# Altium PCB ECG_Signals_V1.0_ZM_20211208.PcbDoc (part 1 of 2)
Units mil, origin at the board's own origin, x right, y up, seen from the top; angles counter-clockwise.
Board outline 3748.77 x 3514.74 mil, 2 copper layers (Top Layer, Bottom Layer); 332 components, 192 nets, 922 pads, 810 vias.
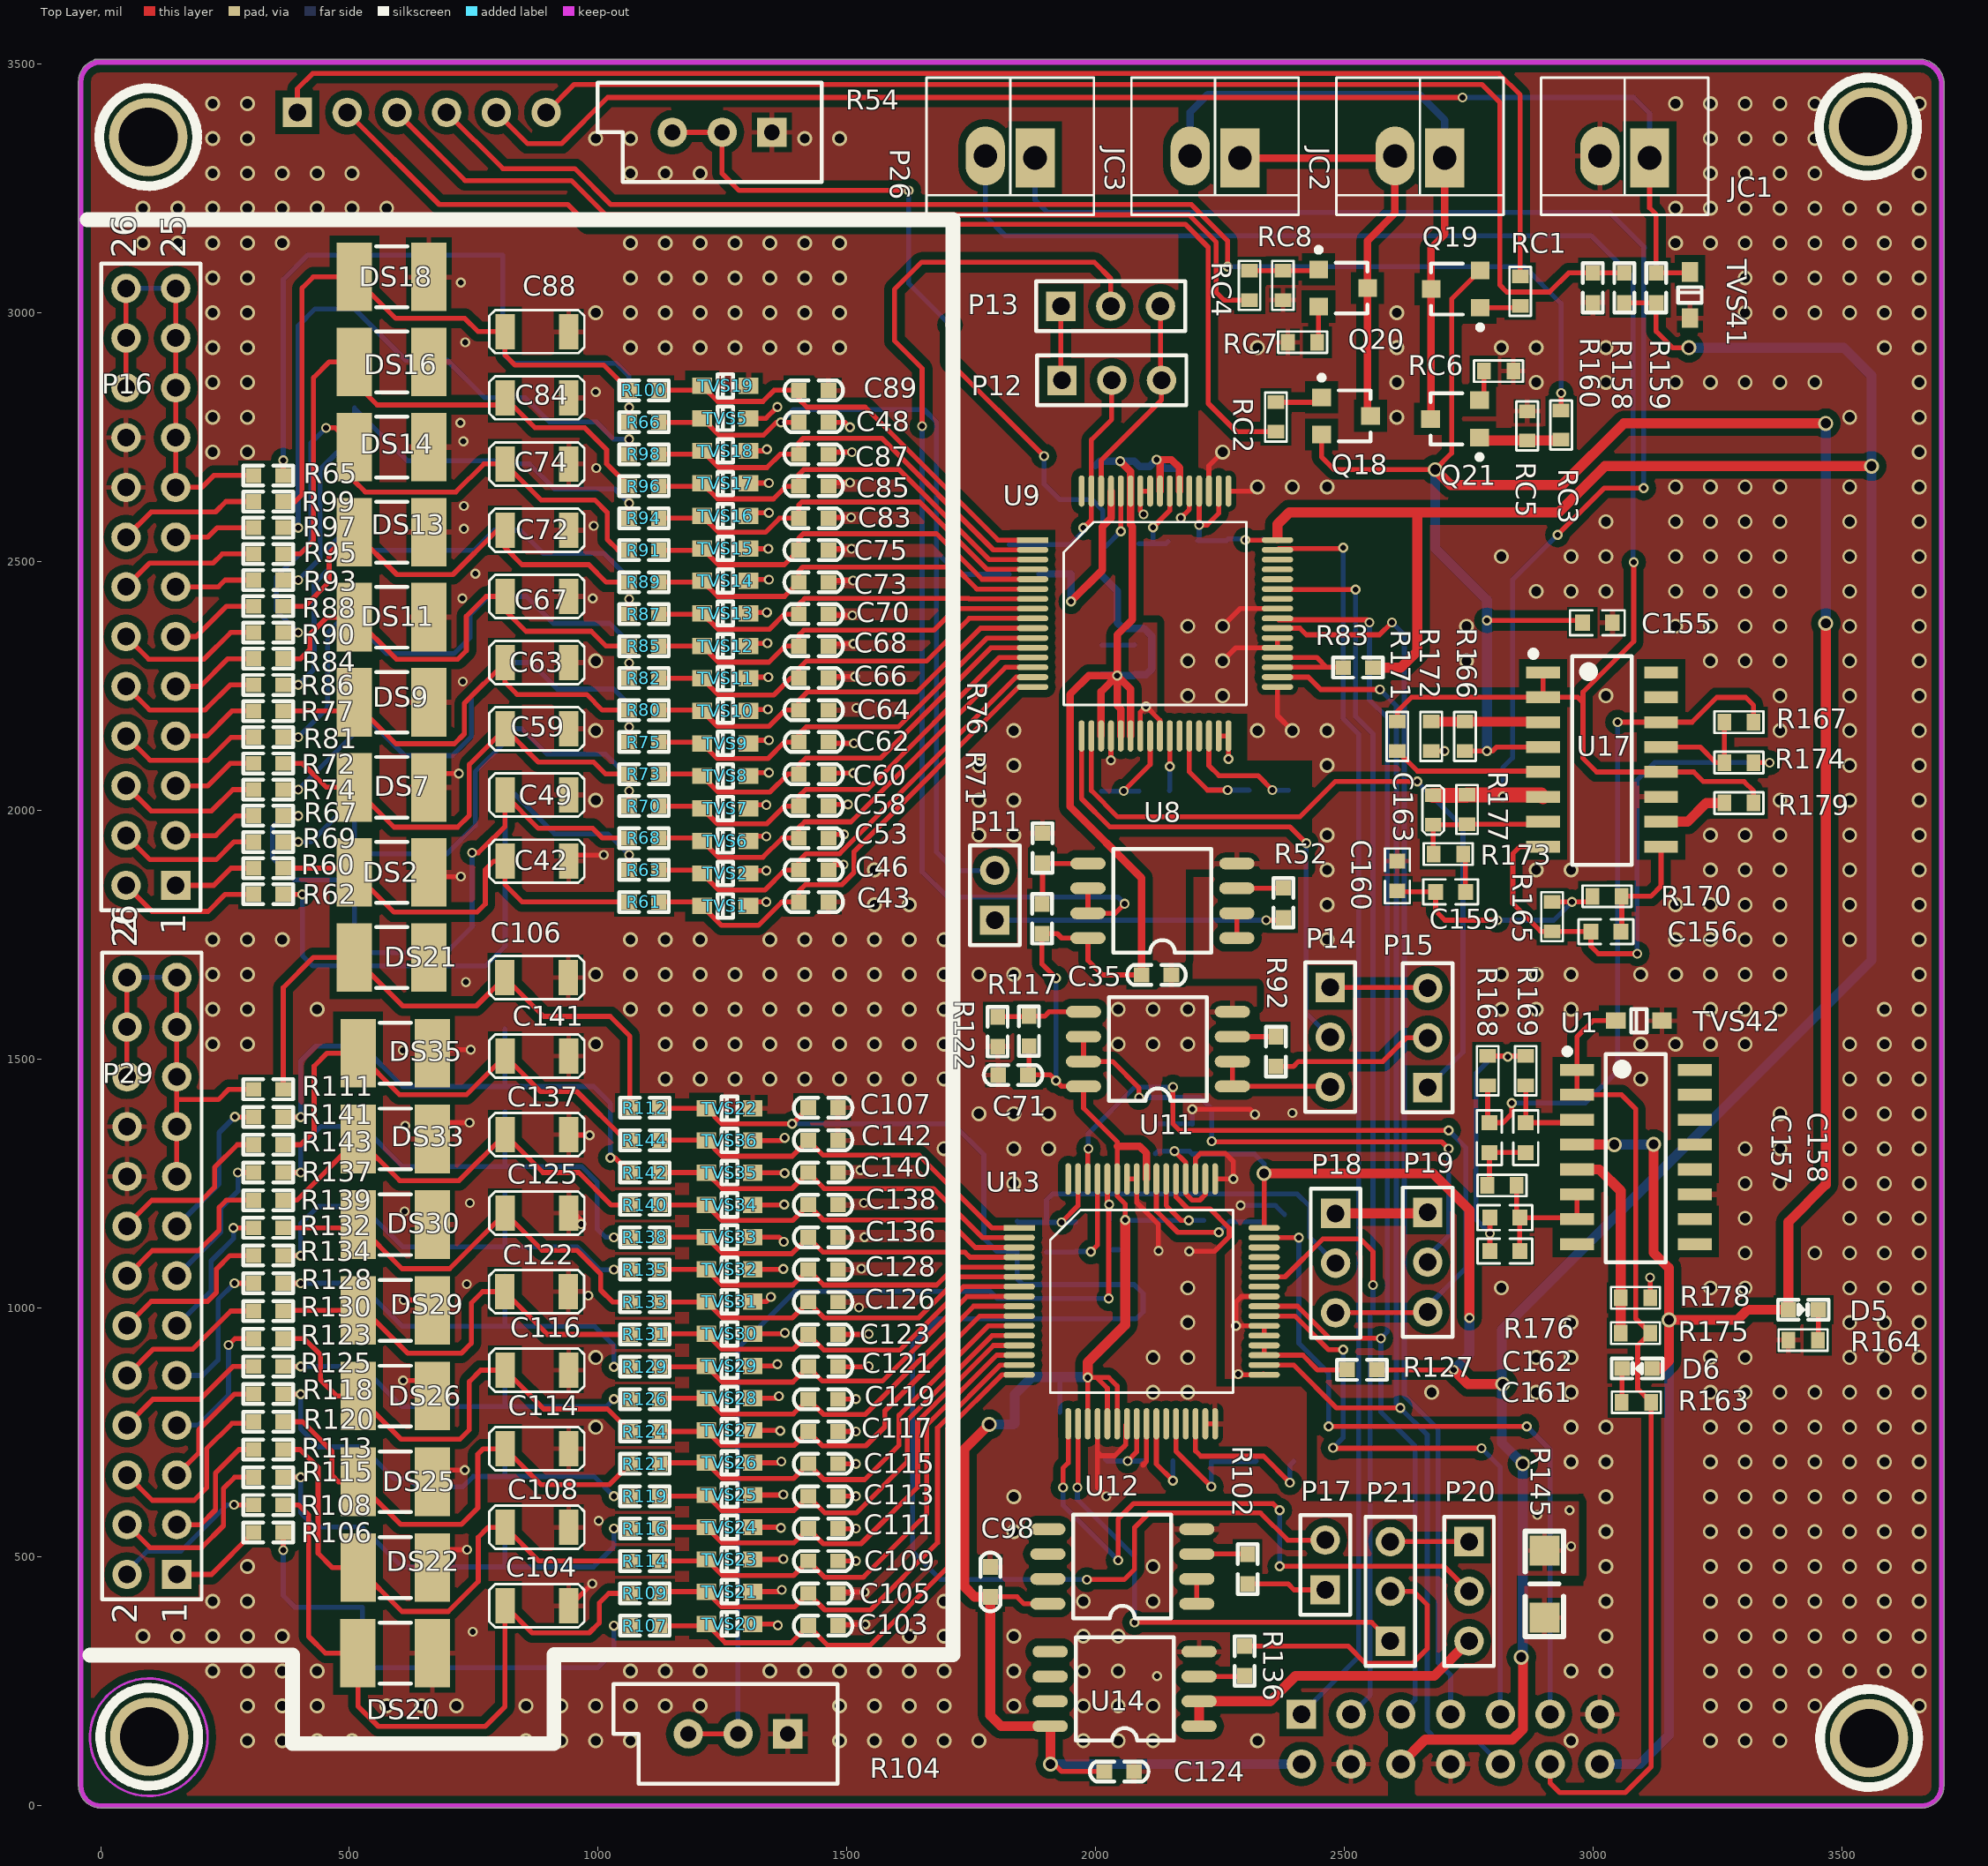
[diagram p0: Top Layer view]
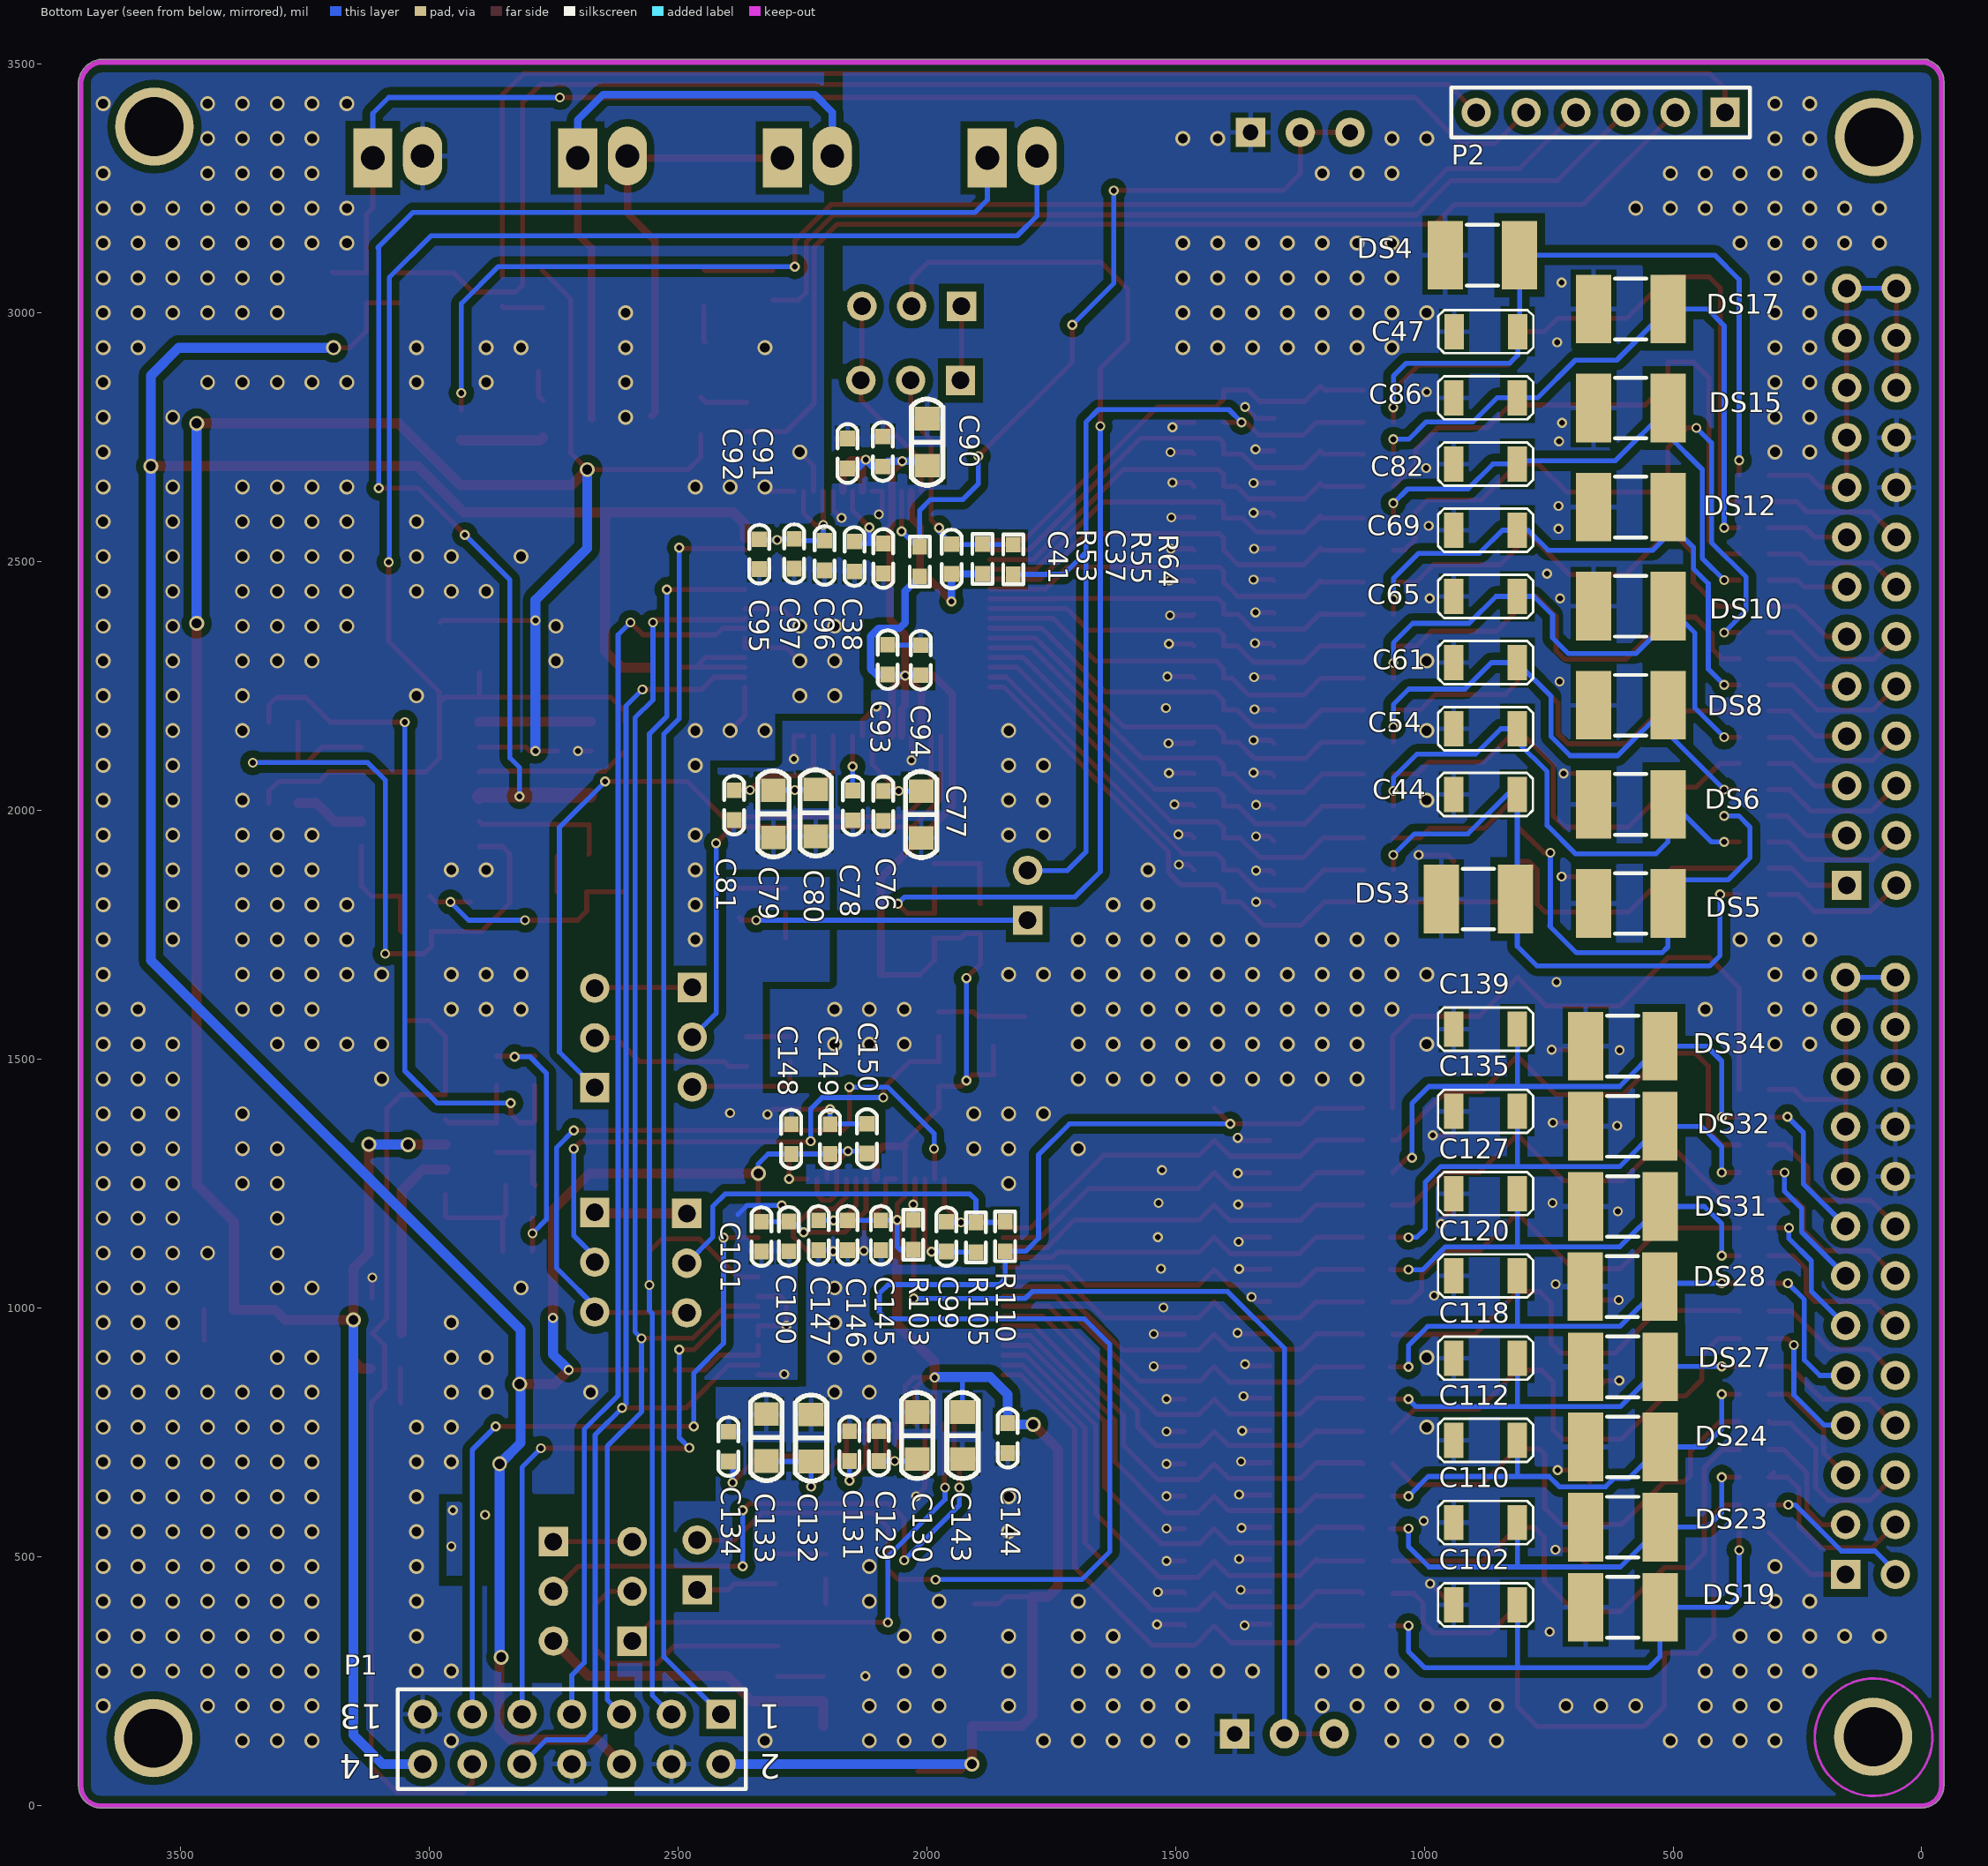
[diagram p1: Bottom Layer view, seen from below]
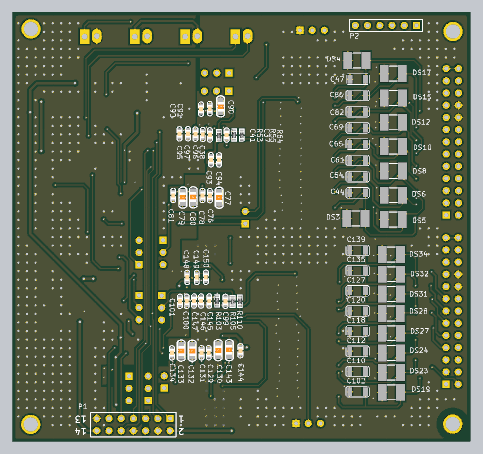
[diagram p3: 3D render of the assembled board from below, using the file's embedded part models]

## Layer stack, top to bottom
Top Solder: solder mask 0.4, Solder Resist, Dk 3.5
Top Layer: signal copper 1.4
Dielectric1: dielectric 12.6, FR-4, Dk 4.8
Bottom Layer: signal copper 1.4
Bottom Solder: solder mask 0.4, Solder Resist, Dk 3.5

## Board outline
-44.39,39.37 -44.39,3464.57 cw(c-39.37,3464.57) -44.38,3464.78 cw(c-39.37,3465) -44.39,3465 cw(c0,3465) -14.25,3507.04 cw(c-10,3504.37) -10,3509.39 3648.56,3509.39 cw(c3654.43,3459.43) 3660.3,3509.39 3660.79,3509.39 cw(c3660.79,3504.37) 3662.53,3509.07 cw(c3654.43,3459.43) 3704.35,3465.62 cw(c3699.37,3465) 3704.39,3465 cw(c3699.37,3465) 3704.38,3464.78 cw(c3699.37,3464.57) 3704.39,3464.57 3704.39,39.37 cw(c3660,39.37) 3661.18,-5 cw(c3660.79,0) 3660.79,-5.01 0,-5.01 cw(c0,39.37)

## Design rules (kind name [scope] priority, off if disabled: settings)
Clearance Clearance_2 [InNet('NetC32_2')] p1: gap=20
Clearance Clearance_1 [InPolygon] p2: gap=15
Clearance [All] p3: gap=6
NetAntennae [All] p1: netantennaetolerance=200
PolygonConnect PolygonConnect_2 [InNet('NetC32_2')] p1: connectstyle=Direct reliefconductorwidth=10 reliefentries=4 polygonreliefangle="90 Angle" airgapwidth=10
PolygonConnect PolygonConnect_1 [isvia] p2: connectstyle=Direct reliefconductorwidth=10 reliefentries=4 polygonreliefangle="90 Angle" airgapwidth=10
PolygonConnect [All] p3: connectstyle=Relief reliefconductorwidth=10 reliefentries=4 polygonreliefangle="90 Angle" airgapwidth=10
RoutingVias [All] p1: holewidth=12 width=24 viastyle="Through Hole" minholewidth=8 minwidth=8 maxholewidth=200 maxwidth=200
SilkToSolderMaskClearance [IsPad] p1: minsilkscreentomaskgap=2 clearancetoexposedcopper=TRUE
SolderMaskExpansion [All] p1: expansion=4
Width [All] p1: maxlimit=360 minlimit=10 preferedwidth=10
28 further rules are at their usual default settings.

## Classes and differential pairs
component class EEG&ECG: C35 C37 C38 C41 C42 C43 C44 C46 C47 C48 C49 C53 C54 C58 C59 C60 C61 C62 C63 C64 C65 C66 C67 C68 C69 C70 C71 C72 C73 C74 C75 C76 C77 C78 C79 C80 C81 C82 C83 C84 C85 C86 C87 C88 C89 C90 C91 C92 C93 C94 C95 C96 C97 C98 C99 C100 C101 C102 C103 C104 C105 C106 C107 C108 C109 C110 C111 C112 C113 C114 C115 C116 C117 C118 C119 C120 C121 C122 C123 C124 C125 C126 C127 C128 C129 C130 C131 C132 C133 C134 C135 C136 C137 C138 C139 C140 C141 C142 C143 C144 C145 C146 C147 C148 C149 C150 DS2 DS3 DS4 DS5 DS6 DS7 DS8 DS9 DS10 DS11 DS12 DS13 DS14 DS15 DS16 DS17 DS18 DS19 DS20 DS21 DS22 DS23 DS24 DS25 DS26 DS27 DS28 DS29 DS30 DS31 DS32 DS33 DS34 DS35 P1 P2 P11 P12 P13 P14 P15 P16 P17 P18 P19 P20 P21 P29 R52 R53 R54 R55 R60 R61 R62 R63 R64 R65 R66 R67 R68 R69 R70 R71 R72 R73 R74 R75 R76 R77 R80 R81 R82 R83 R84 R85 R86 R87 R88 R89 R90 R91 R92 R93 R94 R95 R96 R97 R98 R99 R100 R102 R103 R104 R105 R106 R107 R108 R109 R110 R111 R112 R113 R114 R115 R116 R117 R118 R119 R120 R121 R122 R123 R124 R125 R126 R127 R128 R129 R130 R131 R132 R133 R134 R135 R136 R137 R138 R139 R140 R141 R142 R143 R144 R145 TP4 TVS1 TVS2 TVS5 TVS6 TVS7 TVS8 TVS9 TVS10 TVS11 TVS12 TVS13 TVS14 TVS15 TVS16 TVS17 TVS18 TVS19 TVS20 TVS21 TVS22 TVS23 TVS24 TVS25 TVS26 TVS27 TVS28 TVS29 TVS30 TVS31 TVS32 TVS33 TVS34 TVS35 TVS36 U8 U9 U11 U12 U13 U14
component class Sensor: C155 C156 C157 C158 C159 C160 C161 C162 C163 D5 D6 JC1 JC2 JC3 NC P26 Q18 Q19 Q20 Q21 R158 R159 R160 R163 R164 R165 R166 R167 R168 R169 R170 R171 R172 R173 R174 R175 R176 R177 R178 R179 RC1 RC2 RC3 RC4 RC5 RC6 RC7 RC8 TVS41 TVS42 U1 U16 U17

## Components (designator, comment, footprint, x,y, rotation, side; value= is the part's Value field where it differs from the comment)
C35 "0.1uF/50V" SMD-0603C 2121.91,1669 r180 top
C37 "1.5nF/50V" SMD-0603C 1950,2505 r90 bottom
C38 "1uF/50V" SMD-0603C 2145,2510 r90 bottom
C41 "0.11uF/50V" SMD-0603C 2087,2506 r90 bottom
C42 "47pF/2KV" 1206c 940.75,1897.63 r180 top
C43 "47pF/50V/X5R" SMD-0603C 1433,1815.63 r180 top
C44 "47pF/2KV" 1206c 940.95,2031.63 r180 bottom
C46 "47pF/50V/X5R" SMD-0603C 1433,1879.9 r180 top
C47 "47pF/2KV" 1206c 939.95,2962 r180 bottom
C48 "47pF/50V/X5R" SMD-0603C 1433,2779.73 r180 top
C49 "47pF/2KV" 1206c 940.75,2030.68 r180 top
C53 "47pF/50V/X5R" SMD-0603C 1433,1944.18 r180 top
C54 "47pF/2KV" 1206c 940.75,2163.72 r180 bottom
C58 "47pF/50V/X5R" SMD-0603C 1433,2008.45 r180 top
C59 "47pF/2KV" 1206c 940.75,2163.72 r180 top
C60 "47pF/50V/X5R" SMD-0603C 1433,2072.72 r180 top
C61 "47pF/2KV" 1206c 940.75,2296.77 r180 bottom
C62 "47pF/50V/X5R" SMD-0603C 1433,2137 r180 top
C63 "47pF/2KV" 1206c 940.75,2296.77 r180 top
C64 "47pF/50V/X5R" SMD-0603C 1433,2201.27 r180 top
C65 "47pF/2KV" 1206c 940.75,2429.81 r180 bottom
C66 "47pF/50V/X5R" SMD-0603C 1433,2265.54 r180 top
C67 "47pF/2KV" 1206c 940.75,2429.81 r180 top
C68 "47pF/50V/X5R" SMD-0603C 1433,2329.81 r180 top
C69 "47pF/2KV" 1206c 940.75,2562.86 r180 bottom
C70 "47pF/50V/X5R" SMD-0603C 1433,2394.09 r180 top
C71 "0.1uF/50V" SMD-0603C 1833.91,1468 r0 top
C72 "47pF/2KV" 1206c 940.75,2562.86 r180 top
C73 "47pF/50V/X5R" SMD-0603C 1433,2458.36 r180 top
C74 "47pF/2KV" 1206c 940.75,2695.91 r180 top
C75 "47pF/50V/X5R" SMD-0603C 1433,2522.63 r180 top
C76 "0.1uF/50V" SMD-0603C 2087,2008.63 r90 bottom
C77 "10uF/50V" SMD-0805C 2011,1991.39 r90 bottom
C78 "1uF/50V" SMD-0603C 2148,2009.63 r90 bottom
C79 "22uF/25V" SMD-0805C 2308,1992.76 r90 bottom
C80 "22uF/25V" SMD-0805C 2223,1994.76 r90 bottom
C81 "1uF/50V" SMD-0603C 2387,2010.22 r90 bottom
C82 "47pF/2KV" 1206c 940.75,2695.91 r180 bottom
C83 "47pF/50V/X5R" SMD-0603C 1433,2586.91 r180 top
C84 "47pF/2KV" 1206c 940.75,2828.95 r180 top
C85 "47pF/50V/X5R" SMD-0603C 1433,2651.18 r180 top
C86 "47pF/2KV" 1206c 940.75,2828.95 r180 bottom
C87 "47pF/50V/X5R" SMD-0603C 1433,2715.45 r180 top
C88 "47pF/2KV" 1206c 940.75,2962 r180 top
C89 "47pF/50V/X5R" SMD-0603C 1433,2844 r180 top
C90 "10uF/50V" SMD-0805C 1999,2739.74 r270 bottom
C91 "0.1uF/50V" SMD-0603C 2088,2721 r270 bottom
C92 "1uF/50V" SMD-0603C 2158.91,2717 r270 bottom
C93 "0.1uF/50V" SMD-0603C 2078,2302.63 r270 bottom
C94 "0.1uF/50V" SMD-0603C 2012,2301.63 r270 bottom
C95 "0.1uF/50V" SMD-0603C 2336,2514.65 r90 bottom
C96 "0.1uF/50V" SMD-0603C 2205,2512 r90 bottom
C97 "0.1uF/50V" SMD-0603C 2266,2515.63 r90 bottom
C98 "0.1uF/50V" SMD-0603C 1788,449 r270 top
C99 "1.5nF/50V" SMD-0603C 1960,1143 r90 bottom
C100 "1uF/50V" SMD-0603C 2277,1143.63 r90 bottom
C101 "0.11uF/50V" SMD-0603C 2332,1143 r90 bottom
C102 "47pF/2KV" 1206c 940.75,403 r180 bottom
C103 "47pF/50V/X5R" SMD-0603C 1452,361.01 r180 top
C104 "47pF/2KV" 1206c 940.75,401 r180 top
C105 "47pF/50V/X5R" SMD-0603C 1452,426.06 r180 top
C106 "47pF/2KV" 1206c 940,1663.63 r180 top
C107 "47pF/50V/X5R" SMD-0603C 1452,1401.89 r180 top
C108 "47pF/2KV" 1206c 940.75,558.83 r180 top
C109 "47pF/50V/X5R" SMD-0603C 1452,491.12 r180 top
C110 "47pF/2KV" 1206c 940.75,568.29 r180 bottom
C111 "47pF/50V/X5R" SMD-0603C 1452,556.17 r180 top
C112 "47pF/2KV" 1206c 940.75,733.57 r180 bottom
C113 "47pF/50V/X5R" SMD-0603C 1452,621.23 r180 top
C114 "47pF/2KV" 1206c 940.75,716.66 r180 top
C115 "47pF/50V/X5R" SMD-0603C 1452,686.28 r180 top
C116 "47pF/2KV" 1206c 940.75,874.49 r180 top
C117 "47pF/50V/X5R" SMD-0603C 1452,751.34 r180 top
C118 "47pF/2KV" 1206c 940.75,898.86 r180 bottom
C119 "47pF/50V/X5R" SMD-0603C 1452,816.39 r180 top
C120 "47pF/2KV" 1206c 940.75,1064.14 r180 bottom
C121 "47pF/50V/X5R" SMD-0603C 1452,881.45 r180 top
C122 "47pF/2KV" 1206c 940,1032.31 r180 top
C123 "47pF/50V/X5R" SMD-0603C 1452,946.51 r180 top
C124 "0.1uF/50V" SMD-0603C 2047,68 r180 top
C125 "47pF/2KV" 1206c 940.75,1190.14 r180 top
C126 "47pF/50V/X5R" SMD-0603C 1452,1011.56 r180 top
C127 "47pF/2KV" 1206c 940.75,1229.43 r180 bottom
C128 "47pF/50V/X5R" SMD-0603C 1452,1076.62 r180 top
C129 "0.1uF/50V" SMD-0603C 2096,722 r270 bottom
C130 "10uF/50V" SMD-0805C 2019,743.24 r270 bottom
C131 "1uF/50V" SMD-0603C 2155,722 r270 bottom
C132 "22uF/25V" SMD-0805C 2232,738.24 r270 bottom
C133 "22uF/25V" SMD-0805C 2322,739.24 r270 bottom
C134 "1uF/50V" SMD-0603C 2398,721 r270 bottom
C135 "47pF/2KV" 1206c 940.75,1394.71 r180 bottom
C136 "47pF/50V/X5R" SMD-0603C 1452,1141.67 r180 top
C137 "47pF/2KV" 1206c 940.75,1347.97 r180 top
C138 "47pF/50V/X5R" SMD-0603C 1452,1206.73 r180 top
C139 "47pF/2KV" 1206c 940.75,1560 r180 bottom
C140 "47pF/50V/X5R" SMD-0603C 1452,1271.78 r180 top
C141 "47pF/2KV" 1206c 940.75,1505.8 r180 top
C142 "47pF/50V/X5R" SMD-0603C 1452,1336.84 r180 top
C143 "10uF/50V" SMD-0805C 1928,743.24 r90 bottom
C144 "0.1uF/50V" SMD-0603C 1837,738 r90 bottom
C145 "1uF/50V" SMD-0603C 2092,1145.63 r90 bottom
C146 "0.1uF/50V" SMD-0603C 2159,1145.63 r90 bottom
C147 "0.1uF/50V" SMD-0603C 2217,1145.63 r90 bottom
C148 "0.1uF/50V" SMD-0603C 2272,1339 r270 bottom
C149 "0.1uF/50V" SMD-0603C 2194,1339 r270 bottom
C150 "0.1uF/50V" SMD-0603C 2120,1340 r270 bottom
C155 "0.1uF" C0603 3008,2377 r180 top
C156 "0.47uF" C0603 3025,1756 r0 top
C157 "330NF" C0603 2791,1342 r270 top
C158 "330NF" C0603 2864,1342 r90 top
C159 "10uF" C0603 2713,1836 r0 top
C160 "0.1uF" C0603 2606,1868 r90 top
C161 "330NF" C0603 2822,1114 r180 top
C162 "330NF" C0603 2822,1181 r180 top
C163 "10nF" 0603C 2678,1970.94 r90 top
D5 "LED" LED0603 3422,996.04 r0 top
D6 "LED" LED0603 3087.75,877.78 r180 top
DS2 "UN1812-90CSMD" SMD-1812 584.8,1875 r0 top
DS3 "UN1812-90CSMD" SMD-1812 891,1821.63 r0 bottom
DS4 "UN1812-90CSMD" SMD-1812 883.07,3115.63 r0 bottom
DS5 "UN1812-90CSMD" SMD-1812 585,1812.63 r0 bottom
DS6 "UN1812-90CSMD" SMD-1812 584.8,2011.8 r0 bottom
DS7 "UN1812-90CSMD" SMD-1812 584.8,2046 r0 top
DS8 "UN1812-90CSMD" SMD-1812 584.8,2210.96 r0 bottom
DS9 "UN1812-90CSMD" SMD-1812 584.8,2217 r0 top
DS10 "UN1812-90CSMD" SMD-1812 584.8,2410.13 r0 bottom
DS11 "UN1812-90CSMD" SMD-1812 584.8,2388 r0 top
DS12 "UN1812-90CSMD" SMD-1812 584.8,2609.3 r0 bottom
DS13 "UN1812-90CSMD" SMD-1812 584.8,2559 r0 top
DS14 "UN1812-90CSMD" SMD-1812 584.8,2730 r0 top
DS15 "UN1812-90CSMD" SMD-1812 584.8,2808.46 r0 bottom
DS16 "UN1812-90CSMD" SMD-1812 584.8,2901 r0 top
DS17 "UN1812-90CSMD" SMD-1812 585,3007.63 r0 bottom
DS18 "UN1812-90CSMD" SMD-1812 584.8,3072 r0 top
DS19 "UN1812-90CSMD" SMD-1812 600.75,398 r0 bottom
DS20 "UN1812-90CSMD" SMD-1812 592,305.63 r0 top
DS21 "UN1812-90CSMD" SMD-1812 584.8,1704 r0 top
DS22 "UN1812-90CSMD" SMD-1812 592.2,477.91 r0 top
DS23 "UN1812-90CSMD" SMD-1812 600.75,559.12 r0 bottom
DS24 "UN1812-90CSMD" SMD-1812 600.75,720.25 r0 bottom
DS25 "UN1812-90CSMD" SMD-1812 592.2,650.2 r0 top
DS26 "UN1812-90CSMD" SMD-1812 592.2,822.48 r0 top
DS27 "UN1812-90CSMD" SMD-1812 600.75,881.38 r0 bottom
DS28 "UN1812-90CSMD" SMD-1812 601.75,1042.5 r0 bottom
DS29 "UN1812-90CSMD" SMD-1812 592.2,994.77 r0 top
DS30 "UN1812-90CSMD" SMD-1812 592.2,1167.05 r0 top
DS31 "UN1812-90CSMD" SMD-1812 600.75,1203.62 r0 bottom
DS32 "UN1812-90CSMD" SMD-1812 601,1364.75 r0 bottom
DS33 "UN1812-90CSMD" SMD-1812 592.2,1339.34 r0 top
DS34 "UN1812-90CSMD" SMD-1812 601,1525.88 r0 bottom
DS35 "UN1812-90CSMD" SMD-1812 592.2,1511.62 r0 top
JC1 "CON2" 2X2.54MMZ 3113,3311.06 r180 top
JC2 "CON2" 2X2.54MMZ 2701.33,3311.06 r180 top
JC3 "CON2" 2X2.54MMZ 2289.67,3311.06 r180 top
P1 "Header 7X2" HDR2X7 2413.02,183 r0 bottom
P2 "Header 6" HDR1X6 395.37,3402.63 r0 bottom locked
P11 "NC" HDR1X2 1796.91,1779 r90 top
P12 "NC" HDR1X3 1932,2864 r0 top
P13 "NC" HDR1X3 1930,3013 r0 top
P14 "NC" HDR1X3 2470.91,1644 r270 top
P15 "NC" HDR1X3 2667,1442.63 r90 top
P16 "Header 13X2" HDR2X13 151,1849 r90 top
P17 "NC" HDR1X2 2461,433 r90 top
P18 "NC" HDR1X3 2482,1189.63 r270 top
P19 "NC" HDR1X3 2667,1191.63 r270 top
P20 "NC" HDR1X3 2750,530 r270 top
P21 "NC" HDR1X3 2592,330 r90 top
P26 "Header 2" 2X2.54MMZ 1878,3311.06 r180 top
P29 "Header 13X2" HDR2X13 153,464 r90 top
Q18 "mmbta63l" SOT-23 2503,2792.63 r270 top
Q19 "mmbta63l" SOT-23 2723,3047.5 r90 top
Q20 "mmbta13L" SOT-23 2497,3049.63 r270 top
Q21 "mmbta13L" SOT-23 2722,2786.63 r90 top
R52 "NC" SMD-0603 2376.91,1814 r90 top
R53 "NC" SMD-0603 2013.94,2500 r90 bottom
R54 "NC" VR-05 1249,3362.63 r180 top
R55 "1M" SMD-0603 1888,2505 r90 bottom
R60 "300K" SMD-0603 337,1883.62 r0 top
R61 "22.1K" SMD-0603 1092,1815.63 r0 top
R62 "300K" SMD-0603 337,1831 r0 top
R63 "22.1K" SMD-0603 1092,1879.9 r0 top
R64 "100K" SMD-0603 1826,2504 r270 bottom
R65 "300K" SMD-0603 337,2673 r0 top
R66 "22.1K" SMD-0603 1092,2779.73 r0 top
R67 "300K" SMD-0603 337,1988.88 r0 top
R68 "22.1K" SMD-0603 1092,1944.18 r0 top
R69 "300K" SMD-0603 337,1936.25 r0 top
R70 "22.1K" SMD-0603 1092,2008.45 r0 top
R71 "NC" SMD-0603 1891.91,1782 r90 top
R72 "300K" SMD-0603 337,2094.12 r0 top
R73 "22.1K" SMD-0603 1092,2072.72 r0 top
R74 "300K" SMD-0603 337,2041.5 r0 top
R75 "22.1K" SMD-0603 1092,2137 r0 top
R76 "NC" SMD-0603 1892.91,1924 r90 top
R77 "300K" SMD-0603 337,2199.38 r0 top
R80 "22.1K" SMD-0603 1092,2201.27 r0 top
R81 "300K" SMD-0603 337,2146.75 r0 top
R82 "22.1K" SMD-0603 1092,2265.54 r0 top
R83 "10K" SMD-0603 2527,2286.63 r180 top
R84 "300K" SMD-0603 337,2304.62 r0 top
R85 "22.1K" SMD-0603 1092,2329.81 r0 top
R86 "300K" SMD-0603 337,2252 r0 top
R87 "22.1K" SMD-0603 1092,2394.09 r0 top
R88 "300K" SMD-0603 337,2409.88 r0 top
R89 "22.1K" SMD-0603 1092,2458.36 r0 top
R90 "300K" SMD-0603 337,2357.25 r0 top
R91 "22.1K" SMD-0603 1092,2522.63 r0 top
R92 "NC" SMD-0603 2361.91,1515 r90 top
R93 "300K" SMD-0603 337,2462.5 r0 top
R94 "22.1K" SMD-0603 1092,2586.91 r0 top
R95 "300K" SMD-0603 337,2515.12 r0 top
R96 "22.1K" SMD-0603 1092,2651.18 r0 top
R97 "300K" SMD-0603 337,2567.75 r0 top
R98 "22.1K" SMD-0603 1092,2715.45 r0 top
R99 "300K" SMD-0603 337,2620.38 r0 top
R100 "22.1K" SMD-0603 1092,2844 r0 top
R102 "NC" SMD-0603 2305,475 r90 top
R103 "NC" SMD-0603 2027,1146.63 r90 bottom
R104 "NC" VR-05 1281,143.63 r180 top
R105 "1M" SMD-0603 1901,1141.63 r90 bottom
R106 "300K" SMD-0603 337,548 r0 top
R107 "22.1K" SMD-0603 1093.75,361.01 r0 top
R108 "300K" SMD-0603 337,603.69 r0 top
R109 "22.1K" SMD-0603 1093.75,426.06 r0 top
R110 "100K" SMD-0603 1842,1143.63 r270 bottom
R111 "300K" SMD-0603 337,1439 r0 top
R112 "22.1K" SMD-0603 1093.75,1401.89 r0 top
R113 "300K" SMD-0603 337,715.06 r0 top
R114 "22.1K" SMD-0603 1093.75,491.12 r0 top
R115 "300K" SMD-0603 337,659.38 r0 top
R116 "22.1K" SMD-0603 1093.75,556.17 r0 top
R117 "NC" SMD-0603 1865.91,1556 r90 top
R118 "300K" SMD-0603 337,826.44 r0 top
R119 "22.1K" SMD-0603 1093.75,621.23 r0 top
R120 "300K" SMD-0603 337,770.75 r0 top
R121 "22.1K" SMD-0603 1093.75,686.28 r0 top
R122 "NC" SMD-0603 1802.91,1555 r270 top
R123 "300K" SMD-0603 337,937.81 r0 top
R124 "22.1K" SMD-0603 1093.75,751.34 r0 top
R125 "300K" SMD-0603 337,882.12 r0 top
R126 "22.1K" SMD-0603 1093.75,816.39 r0 top
R127 "10K" SMD-0603 2535,875.14 r180 top
R128 "300K" SMD-0603 337,1049.19 r0 top
R129 "22.1K" SMD-0603 1093.75,881.45 r0 top
R130 "300K" SMD-0603 337,993.5 r0 top
R131 "22.1K" SMD-0603 1093.75,946.51 r0 top
R132 "300K" SMD-0603 337,1160.56 r0 top
R133 "22.1K" SMD-0603 1093.75,1011.56 r0 top
R134 "300K" SMD-0603 337,1104.88 r0 top
R135 "22.1K" SMD-0603 1093.75,1076.62 r0 top
R136 "NC" SMD-0603 2299,290 r270 top
R137 "300K" SMD-0603 337,1271.94 r0 top
R138 "22.1K" SMD-0603 1093.75,1141.67 r0 top
R139 "300K" SMD-0603 337,1216.25 r0 top
R140 "22.1K" SMD-0603 1093.75,1206.73 r0 top
R141 "300K" SMD-0603 337,1383.31 r0 top
R142 "22.1K" SMD-0603 1093.75,1271.78 r0 top
R143 "300K" SMD-0603 337,1327.62 r0 top
R144 "22.1K" SMD-0603 1093.75,1336.84 r0 top
R145 "0/NC" SMD-1206 2902,445 r90 top
R158 "300K/0.1%" SMD-0603 3062,3050 r270 top
R159 "300K/0.1%" SMD-0603 3126,3050 r270 top
R160 "300K/0.1%" SMD-0603 2999,3050 r90 top
R163 "1K" 0603R 3057,810 r0 top
R164 "1K" 0603R 3451,935.04 r180 top
R165 "220K" 0603R 2917,1815.63 r270 top
R166 "10K" 0603R 2742,2178.06 r270 top
R167 "100K" 0603R 3262.94,2177 r0 top
R168 "10K" 0603R 2787.65,1446.94 r90 top
R169 "10K" 0603R 2864,1506 r270 top
R170 "10K" 0603R 2997.94,1827 r0 top
R171 "100K" 0603R 2606,2178.06 r270 top
R172 "10K" 0603R 2674,2119 r90 top
R173 "5K1" 0603R 2738,1912 r180 top
R174 "5K1" 0603R 3322,2095.75 r180 top
R175 "1K" 0603R 3114.06,949 r180 top
R176 "5K1" 0603R 2786.69,1246 r0 top
R177 "220K" 0603R 2746,1971.94 r90 top
R178 "10K" 0603R 3055,1020 r0 top
R179 "100K" 0603R 3322,2014.5 r180 top
RC1 "1K" 0603R 2853,3013.63 r90 top
RC2 "1K" 0603R 2362,2820 r270 top
RC3 "1K" 0603R 2935,2744.63 r90 top
RC4 "1K" 0603R 2309,3084.43 r270 top
RC5 "1K" 0603R 2867,2802.06 r270 top
RC6 "220" 0603R 2780,2882.63 r0 top
RC7 "220" 0603R 2445,2940.63 r180 top
RC8 "1K" 0603R 2376,3025.37 r90 top
TVS1 "PSD05C-LF-T7" SOD-323 1255.46,1807.63 r180 top
TVS2 "PSD05C-LF-T7" SOD-323 1255.46,1872.97 r180 top
TVS5 "PSD05C-LF-T7" SOD-323 1255.46,2787.66 r180 top
TVS6 "PSD05C-LF-T7" SOD-323 1255.46,1938.3 r180 top
TVS7 "PSD05C-LF-T7" SOD-323 1255.46,2003.64 r180 top
TVS8 "PSD05C-LF-T7" SOD-323 1255.46,2068.97 r180 top
TVS9 "PSD05C-LF-T7" SOD-323 1255.46,2134.31 r180 top
TVS10 "PSD05C-LF-T7" SOD-323 1255.46,2199.64 r180 top
TVS11 "PSD05C-LF-T7" SOD-323 1255.46,2264.98 r180 top
TVS12 "PSD05C-LF-T7" SOD-323 1255.46,2330.31 r180 top
TVS13 "PSD05C-LF-T7" SOD-323 1255.46,2395.65 r180 top
TVS14 "PSD05C-LF-T7" SOD-323 1255.46,2460.99 r180 top
TVS15 "PSD05C-LF-T7" SOD-323 1255.46,2526.32 r180 top
TVS16 "PSD05C-LF-T7" SOD-323 1255.46,2591.66 r180 top
TVS17 "PSD05C-LF-T7" SOD-323 1255.46,2656.99 r180 top
TVS18 "PSD05C-LF-T7" SOD-323 1255.46,2722.33 r180 top
TVS19 "PSD05C-LF-T7" SOD-323 1255.46,2853 r180 top
TVS20 "PSD05C-LF-T7" SOD-323 1263.75,364.63 r180 top
TVS21 "PSD05C-LF-T7" SOD-323 1263.75,429.4 r180 top
TVS22 "PSD05C-LF-T7" SOD-323 1263.75,1401 r180 top
TVS23 "PSD05C-LF-T7" SOD-323 1263.75,494.18 r180 top
TVS24 "PSD05C-LF-T7" SOD-323 1263.75,558.95 r180 top
TVS25 "PSD05C-LF-T7" SOD-323 1263.75,623.72 r180 top
TVS26 "PSD05C-LF-T7" SOD-323 1263.75,688.5 r180 top
TVS27 "PSD05C-LF-T7" SOD-323 1263.75,753.27 r180 top
TVS28 "PSD05C-LF-T7" SOD-323 1263.75,818.04 r180 top
TVS29 "PSD05C-LF-T7" SOD-323 1263.75,882.81 r180 top
TVS30 "PSD05C-LF-T7" SOD-323 1263.75,947.59 r180 top
TVS31 "PSD05C-LF-T7" SOD-323 1263.75,1012.36 r180 top
TVS32 "PSD05C-LF-T7" SOD-323 1263.75,1077.13 r180 top
TVS33 "PSD05C-LF-T7" SOD-323 1263.75,1141.91 r180 top
TVS34 "PSD05C-LF-T7" SOD-323 1263.75,1206.68 r180 top
TVS35 "PSD05C-LF-T7" SOD-323 1263.75,1271.45 r180 top
TVS36 "PSD05C-LF-T7" SOD-323 1263.75,1336.23 r180 top
TVS41 "PSD03C-LF-T7" SOD-323 3194,3035.54 r90 top
TVS42 "PSD03C-LF-T7" SOD-323 3091.46,1577 r180 top
U1 "LM2902DR" SO-14Z 2966.89,1478 r0 top
U8 "OPA2376AID/NC" SOIC-8 2133.91,1818 r180 top
U9 "ADS1299IPAG" LQFP-64 1873,2543.11 r0 top
U11 "OPA2376AID/NC" SOIC-8 2124.91,1520 r180 top
U12 "OPA2376AID/NC" SOIC-8 2053.31,480 r180 top
U13 "ADS1299IPAG" LQFP-64 1846.09,1160.57 r0 top
U14 "OPA2376AID/NC" SOIC-8 2058,234 r180 top
U17 "LM2902DR" SO-14Z 2898.89,2277 r0 top

## Footprints (in the part's own frame and the unit in brackets; to place one, negate y for a bottom-side part, rotate by r counter-clockwise, add the part's x,y. Pads: shape width x height; smd on the part's side, far side on the other; paste and mask are expansions set on the pad)
2X2.54MMZ [mm]
  rect 2x3 hole 1.2: 1(0,0)
  oval 2x3 hole 1.2: 2(2.54,-0.1)
  silkscreen extent -3,-4.1 5.54,2.9
0603C [mm]
  rect 0.7x0.85 smd: 1(0,0) 2(1.5,0)
  silkscreen extent -0.5,-0.55 2,0.55
0603R [mm]
  rect 0.7x0.85 smd: 1(0,0) 2(1.5,0)
  silkscreen extent -0.5,-0.55 2,0.55
1206c [mm]
  rect 1x1.8 smd: 1(0,0) 2(3.25,0)
  silkscreen extent -0.8,-1.1 4.05,1.1
C0603 [mil]
  rect 30x32 smd mask+2.5: 1(-30,0) 2(30,0)
  silkscreen extent -55,-25 55,25
HDR1X2 [mm] "Connector; Header; 2 Position"
  rect 1.5x1.5 hole 0.9: 1(0,0)
  round 1.5 hole 0.9: 2(2.54,0)
  silkscreen extent -1.27,-1.27 3.81,1.27
HDR1X3 [mm] "Connector; Header; 3 Position"
  rect 1.5x1.5 hole 0.9: 1(0,0)
  round 1.5 hole 0.9: 2(2.54,0) 3(5.08,0)
  silkscreen extent -1.27,-1.27 6.35,1.27
HDR1X6 [mm] "Connector; Header; 6 Position"
  rect 1.5x1.5 hole 0.9: 1(0,0)
  round 1.5 hole 0.9: 2(2.54,0) 3(5.08,0) 4(7.62,0) 5(10.16,0) 6(12.7,0)
  silkscreen extent -1.27,-1.27 13.97,1.27
HDR2X7 [mm] "Connector; Header; 7x2 Position"
  rect 1.5x1.5 hole 0.9: 1(0,0)
  round 1.5 hole 0.9: 2(0,2.54) 3(2.54,0) 4(2.54,2.54) 5(5.08,0) 6(5.08,2.54) 7(7.62,0) 8(7.62,2.54) 9(10.16,0) 10(10.16,2.54) 11(12.7,0) 12(12.7,2.54) 13(15.24,0) 14(15.24,2.54)
  silkscreen extent -1.27,-1.27 16.51,3.81
HDR2X13 [mm] "Connector; Header; 13x2 Position"
  rect 1.5x1.5 hole 0.9: 1(0,0)
  round 1.5 hole 0.9: 2(0,2.54) 3(2.54,0) 4(2.54,2.54) 5(5.08,0) 6(5.08,2.54) 7(7.62,0) 8(7.62,2.54) 9(10.16,0) 10(10.16,2.54) 11(12.7,0) 12(12.7,2.54) 13(15.24,0) 14(15.24,2.54) 15(17.78,0) 16(17.78,2.54) 17(20.32,0) 18(20.32,2.54) 19(22.86,0) 20(22.86,2.54) 21(25.4,0) 22(25.4,2.54) 23(27.94,0) 24(27.94,2.54) 25(30.48,0) 26(30.48,2.54)
  silkscreen extent -1.27,-1.27 31.75,3.81
LED0603 [mil]
  rect 31.5x30 smd: 1(-30,0) 2(30,0)
  silkscreen extent -51,-20 51,20, body extent -31,-16 32,16, height 24
LQFP-64 [mm]
  rect 1.6x0.3 smd: 1(0,0)
  oval 1.6x0.3 smd: 2(0,-0.5) 3(0,-1) 4(0,-1.5) 5(0,-2) 6(0,-2.5) 7(0,-3) 8(0,-3.5) 9(0,-4) 10(0,-4.5) 11(0,-5) 12(0,-5.5) 13(0,-6) 14(0,-6.5) 15(0,-7) 16(0,-7.5) 33(12.5,-7.5) 34(12.5,-7) 35(12.5,-6.5) 36(12.5,-6) 37(12.5,-5.5) 38(12.5,-5) 39(12.5,-4.5) 40(12.5,-4) 41(12.5,-3.5) 42(12.5,-3) 43(12.5,-2.5) 44(12.5,-2) 45(12.5,-1.5) 46(12.5,-1) 47(12.5,-0.5) 48(12.5,0)
  oval 0.3x1.6 smd: 17(2.5,-10) 18(3,-10) 19(3.5,-10) 20(4,-10) 21(4.5,-10) 22(5,-10) 23(5.5,-10) 24(6,-10) 25(6.5,-10) 26(7,-10) 27(7.5,-10) 28(8,-10) 29(8.5,-10) 30(9,-10) 31(9.5,-10) 32(10,-10) 49(10,2.5) 50(9.5,2.5) 51(9,2.5) 52(8.5,2.5) 53(8,2.5) 54(7.5,2.5) 55(7,2.5) 56(6.5,2.5) 57(6,2.5) 58(5.5,2.5) 59(5,2.5) 60(4.5,2.5) 61(4,2.5) 62(3.5,2.5) 63(3,2.5) 64(2.5,2.5)
  silkscreen extent 1.59,-8.41 10.91,0.91
SMD-0603 [mil]
  rect 31.5x30 smd: 1(-30,0) 2(30,0)
  silkscreen extent -50,-20 50,20, body extent -31,-16 31,16, height 18
SMD-0603C [mil]
  rect 31.5x30 smd: 1(-30,0) 2(30,0)
  silkscreen extent -59,-20 59,20, body extent -32,-16 32,16, height 31
SMD-0805C [mm]
  rect 1.2x1.27 smd: 1(-1.2,0) 2(1.2,0)
  silkscreen extent -2.2,-0.8 2.2,0.8, body extent -1.42,-0.67 1.58,0.73, height 0.93
SMD-1206 [mil]
  rect 60x60 smd: 1(-68,0) 2(67,0)
  silkscreen extent -106,-38 106,39, body extent -63,-31 63,31, height 24
SMD-1812 [mm]
  rect 1.8x3.5 smd: 1(-1.9,0) 2(1.9,0)
  silkscreen extent -0.8,-1.55 0.8,1.55, body extent -2.4,-1.7 2.4,1.7, height 1.4
SO-14Z [mil]
  rect 68x24 smd: 1(0,0) 2(0,-50) 3(0,-100) 4(0,-150) 5(0,-200) 6(0,-250) 7(0,-300) 8(0,-350) 9(237.11,-350) 10(237.11,-300) 11(237.11,-250) 12(237.11,-200) 13(237.11,-150) 14(237.11,-100) 15(237.11,-50) 16(237.11,0)
  silkscreen extent -19,-387 178,38
SOD-323 [mm]
  rect 1x0.83 smd: 1(-1.18,0) 2(1.18,0)
  silkscreen extent -0.4,-0.6 0.4,0.6, body extent -1.4,-0.68 1.4,0.67, height 0.75
SOIC-8 [mm]
  oval 1.8x0.6 smd: 1(-3.8,1.905) 2(-3.8,0.635) 3(-3.8,-0.635) 4(-3.8,-1.905) 5(3.8,-1.905) 6(3.8,-0.635) 7(3.8,0.635) 8(3.8,1.905)
  silkscreen extent -2.5,-2.64 2.5,2.64, body extent -4.2,-2.69 4.2,2.69, height 2.3
SOT-23 [mm] "SOT-23; 3 Leads; Body 3.0 x 2.6 mm, inc. leads (LxW max)"
  rect 0.9x0.95 smd: 1(-0.95,-1.25) 2(0.95,-1.25) 3(0,1.25)
  silkscreen extent -2.07,-1.37 1.3,1.25
VR-05 [mm]
  rect 1.5x1.5 hole 0.8: 1(-2.54,0)
  round 1.5 hole 0.8: 2(0,0) 3(2.54,0)
  silkscreen extent -5.08,-2.54 6.35,2.54

## Part data
C35 C37 C38 C41 C71 C76 C77 C78 C79 C80 C81 C90 C91 C92 C93 C94 C95 C96 C97 C98 C99 C100 C101 C124 C129 C130 C131 C132 C133 C134 C143 C144 C145 C146 C147 C148 C149 C150: library part CAP4, "贴片电容 20%"
C42 C43 C44 C46 C47 C48 C49 C53 C54 C58 C59 C60 C61 C62 C63 C64 C65 C66 C67 C68 C69 C70 C72 C73 C74 C75 C82 C83 C84 C85 C86 C87 C88 C89 C102 C103 C104 C105 C106 C107 C108 C109 C110 C111 C112 C113 C114 C115 C116 C117 C118 C119 C120 C121 C122 C123 C125 C126 C127 C128 C135 C136 C137 C138 C139 C140 C141 C142: library part CAP4, "贴片电容 10%"
C155 C156 C157 C158 C159 C160 C161 C162 C163: library part CAP, "Capacitor"
D5 D6: library part DIODE_LED, "Diode"
DS2 DS3 DS4 DS5 DS6 DS7 DS8 DS9 DS10 DS11 DS12 DS13 DS14 DS15 DS16 DS17 DS18 DS19 DS20 DS21 DS22 DS23 DS24 DS25 DS26 DS27 DS28 DS29 DS30 DS31 DS32 DS33 DS34 DS35: library part DISCHARE-1, "气体放电管 90V"
JC1 JC2 JC3: "Connector"
P1: "Header, 7-Pin, Dual row"
P2: "Header, 6-Pin"
P11 P17: library part "Header 2", "Header, 2-Pin"
P12 P13 P14 P15 P18 P19 P20 P21: library part "Header 3", "Header, 3-Pin"
P16 P29: "Header, 13-Pin, Dual row"
P26: "Header, 2-Pin"
Q18 Q19: library part PNP, "PNP"
Q20 Q21: library part NPN-1, "三极管"
R52 R53 R55 R64 R71 R76 R83 R92 R102 R103 R105 R110 R117 R122 R127 R136 R145: library part RES2, "贴片电阻 5%"
R54 R104: library part RES4, "可调电阻"
R60 R61 R62 R63 R65 R66 R67 R68 R69 R70 R72 R73 R74 R75 R77 R80 R81 R82 R84 R85 R86 R87 R88 R89 R90 R91 R93 R94 R95 R96 R97 R98 R99 R100 R106 R107 R108 R109 R111 R112 R113 R114 R115 R116 R118 R119 R120 R121 R123 R124 R125 R126 R128 R129 R130 R131 R132 R133 R134 R135 R137 R138 R139 R140 R141 R142 R143 R144: library part RES0, "贴片电阻 1%"
R158 R159 R160: library part R, "贴片电阻 1%"
R163 R164: library part RES-SMD
R165 R166 R167 R168 R169 R170 R171 R172 R173 R174 R175 R176 R177 R178 R179 RC1 RC2 RC3 RC4 RC5 RC6 RC7 RC8: library part RES2
TVS1 TVS2 TVS5 TVS6 TVS7 TVS8 TVS9 TVS10 TVS11 TVS12 TVS13 TVS14 TVS15 TVS16 TVS17 TVS18 TVS19 TVS20 TVS21 TVS22 TVS23 TVS24 TVS25 TVS26 TVS27 TVS28 TVS29 TVS30 TVS31 TVS32 TVS33 TVS34 TVS35 TVS36 TVS41 TVS42: library part TVS-S, "单向TVS"
U1 U17: library part TLC274, "Low Power Quad Operational Amplifier"
U8 U11 U12 U14: library part LM358, "运放"

## Free pads (board coordinates)
  round 157.48 hole 118.11: 0(95.8,3353) 0(97.8,137.8) 0(3552,3374) 0(3554,135)

## Via types
v1: diameter 30, hole 20, Top Layer to Bottom Layer, tented both sides, 567 vias
v2: diameter 20, hole 12, Top Layer to Bottom Layer, tented both sides, 243 vias

## Nets (pads, with @x,y where several pads share a name; then routed paths per layer and width w, separated by ;. In a path a pad name is that pad's centre, name@x,y a point inside that pad or via, vN(x,y) a via of type N, cw(c..) or ccw(c..) an arc to the next point about the centre after c; other vN are vias at no path point)
ADC_SPO: P1.12 R163.2 R175.1 TVS42.2 U1.1 U1.2 | length 1964.1
  Top Layer w10: P1.12@2913.02,83 2913.02,44.98 2932.37,25.63 3064,25.63 3116.06,77.68 R163.2@3116.06,810 3089,837.06 3089,923.94 R175.1@3114.06,949 3085,978.05 3085,1399.63 3056.63,1428 U1.2@2966.89,1428 U1.1@2966.89,1478 2966.89,1544.52 2999.37,1577 TVS42.2@3045,1577
ADS129X_CS: P1.7 U9.39 | length 2489.3
  Top Layer w10: U9.39@2365.13,2365.94 2410,2365.94 2423.31,2352.63 2570,2352.63 v2(2595,2377.63)
  Bottom Layer w10: v2(2595,2377.63) 2620,2352.63 2620,823.63 2688,755.63 2688,286.63 2713.02,261.61 P1.7@2713.02,183
ADS129X_CS2: P1.9 U13.39 | length 1241.1
  Top Layer w10: U13.39@2338.22,983.41 2400.22,983.41 2468,915.63 v2(2497,915.63) ; v2(2477,718.4) 2477.77,717.63 v2(2775,717.63)
  Bottom Layer w10: v2(2477,718.4) 2497,738.4 v2(2497,915.63) ; v2(2775,717.63) 2813.02,679.61 P1.9@2813.02,183
ADS129X_DIN: P1.10 U9.34 U13.34 | length 2832.1
  Top Layer w10: U13.34@2338.22,884.98 2397.65,884.98 2484,798.63 v2(2612,798.63) ; U9.34@2365.13,2267.52 2427.11,2267.52 2452,2242.63 v2(2571,2242.63)
  Bottom Layer w10: v2(2571,2242.63) 2604,2209.63 2604,806.63 v2(2612,798.63) 2666,744.63 2666,150.63 2685,131.63 2764.39,131.63 P1.10@2813.02,83
ADS129X_DOUT: P1.3 U9.43 U13.43 | length 2779
  Top Layer w10: U13.43@2338.22,1062.15 2380.15,1062.15 2456.63,1138.63 2531.25,1138.63 2557,1112.88 v2(2557,1045.63) ; U9.43@2365.13,2444.69 2366.18,2443.63 v2(2522,2443.63)
  Bottom Layer w10: P1.3@2513.02,183 2551.47,221.45 2551.47,988.63 2557,994.16 v2(2557,1045.63) 2557,2153.63 2522,2188.63 v2(2522,2443.63)
ADS129X_DRDY: P1.1 U9.47 | length 2538.7
  Top Layer w10: U9.47@2365.13,2523.43 2367.91,2526.2 2495.57,2526.2 v2(2497,2527.63)
  Bottom Layer w10: P1.1@2413.02,183 2528,297.98 2528,2153.63 2497,2184.63 v2(2497,2527.63)
ADS129X_DRDY2: P1.11 U13.47 | length 1470
  Top Layer w10: U13.47@2338.22,1140.89 v2(2408,1140.89) ; v2(2468,761.63) v2(2866,761.63)
  Bottom Layer w10: v2(2408,1140.89) 2408,928.63 2468,868.63 v2(2468,761.63) ; v2(2866,761.63) 2913.02,714.61 P1.11@2913.02,183
ADS129X_SCLK: P1.5 U9.40 U13.40 | length 2705.2
  Top Layer w10: U13.40@2338.22,1003.09 2405.54,1003.09 2470,938.63 v2(2573,938.63) ; U9.40@2365.13,2385.63 2367.91,2382.85 2544.78,2382.85 v2(2550,2377.63)
  Bottom Layer w10: v2(2550,2377.63) 2550,2221.63 2586,2185.63 2586,951.63 v2(2573,938.63) 2573,790.63 2642,721.63 2642,211.98 P1.5@2613.02,183
AVDD: C35.2 C71.2 C90.2 C91.2 C92.2 C93.2 C94.2 C98.2 C124.2 C143.2 C144.2 C145.2 C146.2 C147.2 P1.2 R53.1 R71.1 R103.1 R117.1 U8.8 U9.19 U9.21 U9.22 U9.54 U9.56 U9.59 U11.8 U12.8 U13.19 U13.21 U13.22 U13.54 U13.56 U13.59 U14.8 | length 6418.6
  Top Layer w10: C98.2@1788,419 1841.72,419 1855.72,405 U12.8@1903.71,405 ; R117.1@1865.91,1526 1865.91,1470 C71.2@1863.91,1468 1908.63,1468 v2(1920.13,1456.5) 1931.63,1445 U11.8@1975.3,1445 1975.3,1401.33 2042.94,1333.68 2042.94,1324.63 U13.59@2042.94,1259 2042.94,1224.68 2059,1208.63 v2(2059,1176.63) ; v1@1909,90.63 1931.63,68 C124.2@2017,68 ; v2(1920.13,1662.63) 1891.91,1690.85 R71.1@1891.91,1752 1922.63,1752 1931.63,1743 U8.8@1984.3,1743 1984.3,1698.33 2013.63,1669 C35.2@2091.91,1669 ; U13.19@1983.89,766.87 v2(1983.89,859.74) 2001.89,859.74 ; U13.21@2023.26,766.87 2023.26,838.37 2001.89,859.74 ; U13.22@2042.94,766.87 2042.94,842.68 2025.89,859.74 2001.89,859.74 ; U13.54@2141.37,1259 2141.37,1205.31 2171.06,1175.63 v2(2187,1175.63)
  Top Layer w15: U9.19@2010.8,2149.41 2010.8,2238.43 v2(2043,2270.63) ; 2042.94,1324.63 2088,1324.63 2102,1310.63 U13.56@2102,1259 ; v2(2049,2701.63) 2069.85,2680.78 U9.59@2069.85,2641.54 2069.85,2574.18 2073.67,2570.36 2073.67,2383.3 2043,2352.63 v2(2043,2270.63) ; U9.21@2050.17,2149.41 2050.17,2203.63 2043,2210.8 v2(2043,2270.63) ; 2050.17,2263.46 2069.85,2243.78 U9.22@2069.85,2149.41 ; C35.2@2091.91,1669 2091.91,1863.72 1948,2007.63 1948,2232.63 1986,2270.63 v2(2043,2270.63) ; U9.56@2128.91,2641.54 2128.91,2697.72 v2(2122,2704.63) 2152,2704.63 2168.28,2688.35 U9.54@2168.28,2641.54
  Top Layer w20: v1(1786,765.63) 1736,715.63 1736,439.63 1756.63,419 C98.2@1788,419 1788,180.63 1809.63,159 U14.8@1908.39,159 1909,158.39 1909,90.63 v1(1909,83) ; v2(1983.89,859.74) 1983.89,890.35 2059,965.46 v2(2059,1176.63)
  Bottom Layer w10: v2(1920.13,1456.5) v2(1920.13,1662.63) ; C143.2@1928,790.49 1928,859.63 ; R103.1@2027,1116.63 2053,1116.63 2059,1122.63 v2(2059,1176.63) 2060,1175.63 C145.2@2092,1175.63 C146.2@2159,1175.63 v2(2187,1175.63) C147.2@2217,1175.63
  Bottom Layer w15: C90.2@1999,2692.5 2008.13,2701.63 v2(2049,2701.63) 2077.37,2701.63 C91.2@2088,2691 2108.37,2691 v2(2122,2704.63) 2139.63,2687 C92.2@2158.91,2687 ; C94.2@2012,2271.63 2042,2271.63 v2(2043,2270.63) 2076,2270.63 C93.2@2078,2272.63 2101.34,2272.63 2112.71,2283.99 2112.71,2349.53 2096.6,2365.63 2054.46,2365.63 2043,2377.09 2043,2440.94 R53.1@2013.94,2470
  Bottom Layer w20: v1(1786,765.63) 1834.63,765.63 C144.2@1837,768 1837,825.63 1872,860.63 1983,860.63 v2(1983.89,859.74) ; v1(1909,83) P1.2@2413.02,83
AVSS: C35.1 C42.1 C43.1 C44.1 C46.1 C47.1 C48.1 C49.1 C53.1 C54.1 C58.1 C59.1 C60.1 C61.1 C62.1 C63.1 C64.1 C65.1 C66.1 C67.1 C68.1 C69.1 C70.1 C71.1 C72.1 C73.1 C74.1 C75.1 C76.1 C77.1 C78.1 C79.1 C80.1 C81.1 C82.1 C83.1 C84.1 C85.1 C86.1 C87.1 C88.1 C89.1 C90.1 C91.1 C92.1 C93.1 C94.1 C98.1 C102.1 C103.1 C104.1 C105.1 C106.1 C107.1 C108.1 C109.1 C110.1 C111.1 C112.1 C113.1 C114.1 C115.1 C116.1 C117.1 C118.1 C119.1 C120.1 C121.1 C122.1 C123.1 C124.1 C125.1 C126.1 C127.1 C128.1 C129.1 C130.1 C131.1 C132.1 C133.1 C134.1 C135.1 C136.1 C137.1 C138.1 C139.1 C140.1 C141.1 C142.1 C143.1 C144.1 C145.1 C146.1 C147.1 DS2.2 DS3.2 DS4.2 DS5.2 DS6.2 DS7.2 DS8.2 DS9.2 DS10.2 DS11.2 DS12.2 DS13.2 DS14.2 DS15.2 DS16.2 DS17.2 DS18.2 DS19.2 DS20.2 DS21.2 DS22.2 DS23.2 DS24.2 DS25.2 DS26.2 DS27.2 DS28.2 DS29.2 DS30.2 DS31.2 DS32.2 DS33.2 DS34.2 DS35.2 P1.4 P16.18 P16.20 P29.18 P29.20 R54.1 R76.2 R104.1 R122.2 R145.2 TVS1.1 TVS2.1 TVS5.1 TVS6.1 TVS7.1 TVS8.1 TVS9.1 TVS10.1 TVS11.1 TVS12.1 TVS13.1 TVS14.1 TVS15.1 TVS16.1 TVS17.1 TVS18.1 TVS19.1 TVS20.1 TVS21.1 TVS22.1 TVS23.1 TVS24.1 TVS25.1 TVS26.1 TVS27.1 TVS28.1 TVS29.1 TVS30.1 TVS31.1 TVS32.1 TVS33.1 TVS34.1 TVS35.1 TVS36.1 U8.4 U9.20 U9.23 U9.25 U9.31 U9.32 U9.53 U9.57 U9.58 U11.4 U12.4 U13.20 U13.23 U13.25 U13.31 U13.32 U13.53 U13.57 U13.58 U14.4 | length 4830.7
  Top Layer w10: v2(608,853.63) 635.85,853.63 DS26.2@667,822.48 ; v2(609,1015.63) 646.14,1015.63 DS29.2@667,994.77 ; DS2.2@659.61,1875 667.98,1866.63 v2(724,1866.63) ; DS7.2@659.61,2046 687.24,2073.63 v2(720,2073.63) ; DS22.2@667,477.91 702.72,513.63 v2(736.22,513.63) ; DS25.2@667,650.2 690.43,673.63 v2(732,673.63) ; DS33.2@667,1339.34 699.66,1372 v2(741.4,1372) ; DS35.2@667,1511.62 674.01,1518.63 v2(743.82,1518.63) ; C104.1@940.75,401 943.37,401 v2(988,445.63) ; C125.1@940.75,1190.14 946.23,1195.63 966,1175.86 v2(966,1168.31) ; C137.1@940.75,1347.97 942.09,1346.63 v2(983,1346.63) ; C42.1@940.75,1897.63 953.2,1910.08 v2(1011,1910.08) ; TVS1.1@1301.91,1807.63 1309.91,1815.63 v2(1337.73,1815.63) ; TVS2.1@1301.91,1872.97 1307.58,1878.63 v2(1337.73,1878.63) ; TVS6.1@1301.91,1938.3 1311.24,1947.63 v2(1337.73,1947.63) ; TVS7.1@1301.91,2003.64 1308.91,2010.63 v2(1338,2010.63) ; TVS8.1@1301.91,2068.97 1308.57,2075.63 v2(1343,2075.63) ; TVS9.1@1301.91,2134.31 1308.24,2140.63 v2(1343,2140.63) ; TVS10.1@1301.91,2199.64 1304.9,2202.63 v2(1341,2202.63) ; TVS11.1@1301.91,2264.98 1304.45,2267.52 v2(1342,2267.52) ; TVS12.1@1301.91,2330.31 1307.23,2335.63 v2(1340,2335.63) ; TVS13.1@1301.91,2395.65 1303.89,2397.63 v2(1339,2397.63) ; TVS14.1@1301.91,2460.99 1304.56,2463.63 v2(1343,2463.63) ; TVS15.1@1301.91,2526.32 1302.61,2525.63 v2(1342,2525.63) ; TVS16.1@1301.91,2591.66 1307.89,2597.63 v2(1343,2597.63) ; TVS17.1@1301.91,2656.99 1302.55,2657.63 v2(1343,2657.63) ; TVS18.1@1301.91,2722.33 1335.7,2722.33 v2(1339,2725.63) ; TVS5.1@1301.91,2787.66 1337.03,2787.66 v2(1360,2810.63) ; TVS20.1@1310.2,364.63 1358,364.63 v2(1361,361.63) ; TVS21.1@1310.2,429.4 1365.4,429.4 v2(1369,433) ; TVS23.1@1310.2,494.18 v2@1371.09,494.18 ; TVS24.1@1310.2,558.95 1365.68,558.95 v2(1367,557.63) ; TVS25.1@1310.2,623.72 1371.09,623.72 v2(1372,624.63) ; TVS26.1@1310.2,688.5 1365.42,688.5 v2(1368,691.07) ; TVS27.1@1310.2,753.27 1365.36,753.27 v2(1366,752.63) ; TVS28.1@1310.2,818.04 1358.56,818.04 v2(1363,822.48) ; TVS29.1@1310.2,882.81 1356.18,882.81 v2(1360,886.63) ; TVS30.1@1310.2,947.59 1372.96,947.59 v2(1375,949.63) ; TVS31.1@1310.2,1012.36 1337.73,1012.36 v2(1347,1021.63) ; TVS32.1@1310.2,1077.13 v2@1371.09,1077.13 ; TVS33.1@1310.2,1141.91 1363.72,1141.91 v2(1373,1132.63) ; TVS34.1@1310.2,1206.68 1373.05,1206.68 v2(1374,1207.63) ; TVS35.1@1310.2,1271.45 1374,1271.45 v2(1374.82,1270.63) ; TVS36.1@1310.2,1336.23 1369.42,1336.23 v2(1374.82,1341.63) ; C46.1@1463,1879.9 1473.73,1890.63 v2(1493,1890.63) ; C53.1@1463,1944.18 1470.45,1951.63 v2(1494,1951.63) ; C58.1@1463,2008.45 1466.18,2011.63 v2(1502,2011.63) ; C60.1@1463,2072.72 1464.91,2074.63 v2(1513,2074.63) ; C62.1@1463,2137 1465.37,2134.63 v2(1514,2134.63) ; C66.1@1463,2265.54 1466.09,2268.63 v2(1516,2268.63) ; C68.1@1463,2329.81 1467.82,2334.63 v2(1513,2334.63) ; C70.1@1463,2394.09 1465.46,2391.63 v2(1511,2391.63) ; C73.1@1463,2458.36 1466.27,2461.63 v2(1512,2461.63) ; C75.1@1463,2522.63 1466,2525.63 v2(1509,2525.63) ; C83.1@1463,2586.91 1464.72,2588.63 v2(1508,2588.63) ; C85.1@1463,2651.18 1470.45,2658.63 v2(1506,2658.63) ; C87.1@1463,2715.45 1467.18,2719.63 v2(1510,2719.63) ; C48.1@1463,2779.73 1495.9,2779.73 v2(1506,2769.63) ; C103.1@1482,361.01 1484.62,363.63 v2(1537,363.63) ; C105.1@1482,426.06 1484.57,428.63 v2(1535.38,428.63) ; C109.1@1482,491.12 v2(1518,491.12) ; C111.1@1482,556.17 v2(1518,556.17) ; C113.1@1482,621.23 v2(1518,621.23) ; C115.1@1482,686.28 v2(1518,686.28) ; C117.1@1482,751.34 v2(1518,751.34) ; C119.1@1482,816.39 v2(1518,816.39) ; C121.1@1482,881.45 v2@1542.89,881.45 ; C123.1@1482,946.51 v2@1542.89,946.51 ; U13.20@2003.57,766.87 2003.57,709.63 ; v2(2021,621.03) 2003.57,638.46 2003.57,709.63 ; v2(2030.48,2100.48) U9.20@2030.48,2149.41 ; U13.23@2062.63,766.87 2059.85,764.09 2059.85,724.38 2038.1,702.63 2010.57,702.63 2003.57,709.63 ; U13.58@2062.63,1259 U13.57@2082.31,1259 2082.31,1211.31 2126,1167.63 v2(2126,1114.63) ; U9.23@2089.54,2149.41 2089.54,2197.17 v2(2101,2208.63) 2128.91,2180.72 U9.25@2128.91,2149.41 ; 2094.56,683.63 2102,691.07 U13.25@2102,766.87 ; v2(2096,2594.63) 2089.54,2601.09 U9.58@2089.54,2641.54 U9.57@2109.22,2641.54 ; U13.53@2161.06,1259 2161.06,1222.78 2185.2,1198.63 2229.7,1198.63 2268,1160.33 2268,1142.93 2238.7,1113.63 v2(2187.96,1113.63) ; v2(2170.89,2587.63) 2187.96,2604.7 U9.53@2187.96,2641.54 ; U13.31@2220.11,766.87 U13.32@2239.8,766.87 ; U9.31@2247.02,2149.41 U9.32@2266.7,2149.41 v2(2266.7,2102.93)
  Bottom Layer w10: C94.1@2012,2331.63 2077,2331.63 C93.1@2078,2332.63
  other v1: 295,130 365,130 435,130 505,130 855,130 925,130 995,130 1065,130 1485,130 1555,130 1625,130 1695,130 1765,130 1975,130 2045,130 2115,130 2325,130 295,200 365,200 435,200 575,200 645,200 715,200 855,200 925,200 995,200 1065,200 1135,200 1205,200 1485,200 1555,200 1625,200 1695,200 1835,200 1975,200 2045,200 2115,200 225,270 295,270 365,270 435,270 1065,270 1135,270 1205,270 1345,270 1415,270 1485,270 1555,270 1625,270 1695,270 1835,270 1975,270 2045,270 85,340 155,340 225,340 295,340 365,340 1625,340 1695,340 1835,340 1975,340 2045,340 225,410 295,410 1695,410 1975,410 2115,410 295,480 2115,480 1835,550 1835,620 995,760 2115,830 2185,830 995,900 2115,900 2185,900 2185,970 2185,1040 1835,1250 1695,1320 1835,1320 1905,1320 1765,1390 1835,1390 1905,1390 1135,1460 1205,1460 1275,1460 1345,1460 1415,1460 1485,1460 1555,1460 1625,1460 1695,1460 225,1530 295,1530 995,1530 1135,1530 1205,1530 1275,1530 1345,1530 1415,1530 1485,1530 1555,1530 1625,1530 1695,1530 2045,1530 2115,1530 2185,1530 225,1600 295,1600 435,1600 1065,1600 1135,1600 1205,1600 1275,1600 1345,1600 1415,1600 1485,1600 1555,1600 1625,1600 1695,1600 2045,1600 2115,1600 2185,1600 225,1670 295,1670 995,1670 1065,1670 1135,1670 1205,1670 1275,1670 1345,1670 1415,1670 1485,1670 1555,1670 1625,1670 1695,1670 1765,1670 1835,1670 225,1740 295,1740 365,1740 1065,1740 1135,1740 1205,1740 1345,1740 1415,1740 1485,1740 1555,1740 1625,1740 1695,1740 1555,1810 1625,1810 1555,1880 1765,1950 1835,1950 995,2020 1765,2020 1835,2020 1765,2090 1835,2090 995,2160 1835,2160 995,2300 225,2720 295,2720 225,2790 295,2790 225,2860 295,2860 225,2930 295,2930 1065,2930 1135,2930 1205,2930 1275,2930 1345,2930 1415,2930 1485,2930 225,3000 295,3000 995,3000 1065,3000 1135,3000 1205,3000 1275,3000 1345,3000 1415,3000 1485,3000 225,3070 295,3070 1065,3070 1135,3070 1205,3070 1275,3070 1345,3070 1415,3070 1485,3070 85,3140 155,3140 225,3140 295,3140 365,3140 1065,3140 1135,3140 1205,3140 1275,3140 1345,3140 1415,3140 1485,3140 85,3210 155,3210 225,3210 295,3210 365,3210 435,3210 505,3210 575,3210 225,3280 295,3280 365,3280 435,3280 505,3280 1065,3280 1135,3280 1205,3280 225,3350 295,3350 995,3350 1065,3350 1415,3350 1485,3350 225,3420 295,3420
  other v2: 2123,259.63 748,348.63 1372,495.08 2955,520.63 1001,571.63 2887.18,583.63 2951.92,593 1543.8,882.36 1543.8,947.41 1524,1000.63 980,1024.63 736,1047.63 1372,1078.04 1529,1078.63 1535,1141.91 611,1193.63 742,1210.63 1534,1210.63 1527,1276.63 612,1365.63 607.37,1517.63 734,1654.63 1519,2205.63 728,2258.63 727,2425.63 989,2425.63 753,2475.63 730,2565.63 991,2571.63 730,2611.63 996,2687.63 729,2741.63 723,2778.63 995,2840.63 732.61,2940.63 724,3060.63
BIAS_ELEC: P12.1 P13.1 | length 149.8
  Top Layer w10: P13.1@1930,3013 1930,2866 P12.1@1932,2864
BIAS_ELEC2: P18.1 P19.1 | length 148.8
  Top Layer w20: P18.1@2508,1190 2654,1190 P19.1@2656,1192
BIAS_SHD: U8.1 U8.2 | length 50
  Top Layer w10: U8.1@2283.51,1743 U8.2@2283.51,1793
BIAS_SHD2: U12.1 U12.2 | length 50
  Top Layer w10: U12.1@2202.92,405 U12.2@2202.92,455
CIN2P: P29.17 P29.19 P29.21 P29.22 P29.23 P29.24 P29.25 P29.26 R111.1 | length 861.5
  Top Layer w10: P29.22@53,1464 P29.24@53,1564 P29.26@53,1664 ; P29.17@153,1264 P29.19@153,1364 P29.21@153,1464 P29.23@153,1564 P29.25@153,1664 ; 154,1418.4 236.77,1418.4 257.37,1439 R111.1@307,1439
  Bottom Layer w10: P29.26@53,1664 P29.25@153,1664
CINN1: P16.2 R62.1 | length 291.9
  Top Layer w10: P16.2@51,1849 103.37,1796.63 216,1796.63 250.37,1831 R62.1@307,1831
CINN2: P16.4 R69.1 | length 290.8
  Top Layer w10: P16.4@51,1949 99.37,1900.63 232,1900.63 267.62,1936.25 R69.1@307,1936.25
CINN3: P16.6 R74.1 | length 294.6
  Top Layer w10: P16.6@51,2049 101.37,1998.63 223,1998.63 265.87,2041.5 R74.1@307,2041.5
CINN4: P16.8 R81.1 | length 295.1
  Top Layer w10: P16.8@51,2149 99.37,2100.63 216,2100.63 262.12,2146.75 R81.1@307,2146.75
CINN5: P16.10 R86.1 | length 296.5
  Top Layer w10: P16.10@51,2249 98.37,2201.63 210,2201.63 260.37,2252 R86.1@307,2252
CINN6: P16.12 R90.1 | length 297
  Top Layer w10: P16.12@51,2349 96.37,2303.63 208,2303.63 261.62,2357.25 R90.1@307,2357.25
CINN7: P16.14 R95.1 | length 283.4
  Top Layer w10: P16.14@51,2449 98.63,2496.63 226,2496.63 244.5,2515.12 R95.1@307,2515.12
CINN8: P16.16 R99.1 | length 285.6
  Top Layer w10: P16.16@51,2549 101.63,2599.63 231,2599.63 251.75,2620.38 R99.1@307,2620.38
CINN21: P29.2 R108.1 | length 315.7
  Top Layer w10: v2(268,604) 306.57,604 306.94,603.63 R108.1@307,603.69
  Bottom Layer w10: P29.2@53,464 53,470 94,511 161.37,511 254.37,604 v2(268,604)
CINN22: P29.4 R115.1 | length 388.6
  Top Layer w10: P29.4@53,564 99,518 203,518 247,562 247,637 269.38,659.38 R115.1@307,659.38 R115.1@297.75,668.63
CINN23: P29.6 R120.1 | length 386.6
  Top Layer w10: P29.6@53,664 104,613 188,613 213,638 213,716.69 263.94,767.63 303.88,767.63 R120.1@307,770.75
CINN24: P29.8 R125.1 | length 302.9
  Top Layer w10: P29.8@53,764 105,816 200,816 266.12,882.12 R125.1@307,882.12
CINN25: P29.10 R130.1 | length 307.6
  Top Layer w10: P29.10@53,864 106,917 185,917 261.5,993.5 R130.1@307,993.5
CINN26: P29.12 R134.1 | length 339.9
  Top Layer w10: P29.12@53,964 102,1013 215,1013 233,1031 233,1078 259.88,1104.88 R134.1@307,1104.88
CINN27: P29.14 R139.1 | length 343.8
  Top Layer w10: P29.14@53,1064 104,1115 197,1115 238.18,1156.18 238.18,1201.81 252.62,1216.25 R139.1@307,1216.25
CINN28: P29.16 R143.1 | length 346.4
  Top Layer w10: P29.16@53,1164 53,1166 103,1216 203,1216 229,1242 229,1282 274.62,1327.62 R143.1@307,1327.62
CINP: P16.17 P16.19 P16.21 P16.22 P16.23 P16.24 P16.25 P16.26 R65.1 | length 865.9
  Top Layer w10: P16.22@51,2849 P16.24@51,2949 P16.26@51,3049 ; P16.25@151,3049 P16.23@151,2949 P16.21@151,2849 P16.19@151,2749 P16.17@151,2649 203.37,2649 227.37,2673 R65.1@307,2673
  Bottom Layer w10: P16.26@51,3049 P16.25@151,3049
CINP1: P16.1 R60.1 | length 170.3
  Top Layer w10: P16.1@151,1849 227.37,1849 262,1883.62 R60.1@307,1883.62
CINP2: P16.3 R67.1 | length 172.5
  Top Layer w10: P16.3@151,1949 231.37,1949 271.25,1988.88 R67.1@307,1988.88
CINP3: P16.5 R72.1 | length 174.7
  Top Layer w10: P16.5@151,2049 215.37,2049 260.5,2094.12 R72.1@307,2094.12
CINP4: P16.7 R77.1 | length 176.9
  Top Layer w10: P16.7@151,2149 213.37,2149 263.75,2199.38 R77.1@307,2199.38
CINP5: P16.9 R84.1 | length 179
  Top Layer w10: P16.9@151,2249 200.23,2249 255.86,2304.62 R84.1@307,2304.62
CINP6: P16.11 R88.1 | length 181.2
  Top Layer w10: P16.11@151,2349 192.01,2349 252.88,2409.88 R88.1@307,2409.88
CINP7: P16.13 R93.1 | length 161.6
  Top Layer w10: P16.13@151,2449 236.64,2449 250.14,2462.5 R93.1@307,2462.5
CINP8: P16.15 R97.1 | length 163.8
  Top Layer w10: P16.15@151,2549 215.37,2549 234.12,2567.75 R97.1@307,2567.75
CINP21: P29.1 R106.1 | length 188.8
  Top Layer w10: P29.1@153,464 223,464 R106.1@307,548
CINP22: P29.3 R113.1 | length 260
  Top Layer w10: P29.3@153,564 201,564 231,594 231,668.06 278,715.06 R113.1@307,715.06
CINP23: P29.5 R118.1 | length 248.5
  Top Layer w10: P29.5@153,664 197,708 197,754.44 269,826.44 R118.1@307,826.44
CINP24: P29.7 R123.1 | length 284.6
  Top Layer w10: v2(257,925) 269.81,937.81 R123.1@307,937.81
  Bottom Layer w10: P29.7@153,764 196,764 257,825 v2(257,925)
CINP25: P29.9 R128.1 | length 301.7
  Top Layer w10: v2(269,1049.19) R128.1@307,1049.19
  Bottom Layer w10: P29.9@153,864 205,864 236,895 236,1016.19 v2(269,1049.19)
CINP26: P29.11 R132.1 | length 283.8
  Top Layer w10: v2(267,1160.56) R132.1@307,1160.56
  Bottom Layer w10: P29.11@153,964 222,1033 222,1094 267,1139 v2(267,1160.56)
CINP27: P29.13 R137.1 | length 290
  Top Layer w10: v2(275.84,1271.94) R137.1@307,1271.94
  Bottom Layer w10: P29.13@153,1064 241.5,1152.5 241.5,1199.86 275.84,1234.2 v2(275.84,1271.94)
CINP28: P29.15 R141.1 | length 305.7
  Top Layer w10: v2(270,1384) 270.69,1383.31 R141.1@307,1383.31
  Bottom Layer w10: P29.15@153,1164 238,1249 238,1352 v2(270,1384)
DVDD: C95.2 C96.2 C97.2 C148.2 C149.2 C150.2 P1.6 R83.1 R127.1 R158.2 R159.2 U9.48 U9.50 U9.52 U13.48 U13.50 U13.52 | length 7536.6
  Top Layer w10: v2(2158,1314.63) 2180.74,1291.89 U13.52@2180.74,1259 2180.74,1229.19 2193.42,1216.5 2208.98,1216.5 2220.11,1227.63 U13.50@2220.11,1259 ; U9.52@2207.65,2641.54 v2(2207.65,2573.28) 2223.65,2573.28 2247.02,2596.65 U9.50@2247.02,2641.54 ; v2(2300.52,2543.11) U9.48@2365.13,2543.11 ; U13.48@2338.22,1160.57 v1(2338.22,1269.85) ; R127.1@2565,875.14 v2(2719.49,875.14) ; R158.2@3062,3020 R159.2@3126,3020 3126,2962.63 3159,2929.63 v1(3192,2929.63)
  Top Layer w20: v1(2338.22,1269.85) 2677.78,1269.85 2751,1196.63 v2(2751,979.63) ; U9.48@2365.13,2547.1 2365.13,2574.76 2389,2598.63 2646.37,2598.63 ; R83.1@2557,2286.63 2613,2286.63 2646.37,2320 2646.37,2598.63 ; P1.6@2613.02,83 2662,131.98 2837.35,131.98 2858.55,153.18 2858.55,294.08 v1(2855,297.63) ; v2(2719.49,875.14) 2748,846.63 v1(2818,846.63) ; v1(3559,2691.63) 3023,2691.63 2930,2598.63 2646.37,2598.63
  Bottom Layer w10: C150.2@2120,1310 2124.63,1314.63 v2(2158,1314.63) 2188.37,1314.63 C149.2@2194,1309 C148.2@2272,1309 2318.63,1309 2338.22,1289.41 v1(2338.22,1269.85) ; v2(2207.65,2573.28) 2207.65,2544.65 C96.2@2205,2542 2262.37,2542 C97.2@2266,2545.63 2298,2545.63 v2(2300.52,2543.11) 2334.46,2543.11 C95.2@2336,2544.65
  Bottom Layer w20: v2(2719.49,875.14) 2751,906.65 v2(2751,979.63) ; v1(2855,297.63) 2858,300.63 v1(2858,686.28) 2816,728.28 2816,955.63 3559,1698.63 v1(3559,2691.63) 3559,2873.63 3503,2929.63 v1(3192,2929.63)